# Altium PCB 第二形态第二版（4层）.pcbdoc
Units mil, origin at the board's own origin, x right, y up, seen from the top; angles counter-clockwise.
Board outline 2935 x 4395 mil, 2 copper layers (Top Layer, Bottom Layer); 39 components, 53 nets, 165 pads, 29 vias.
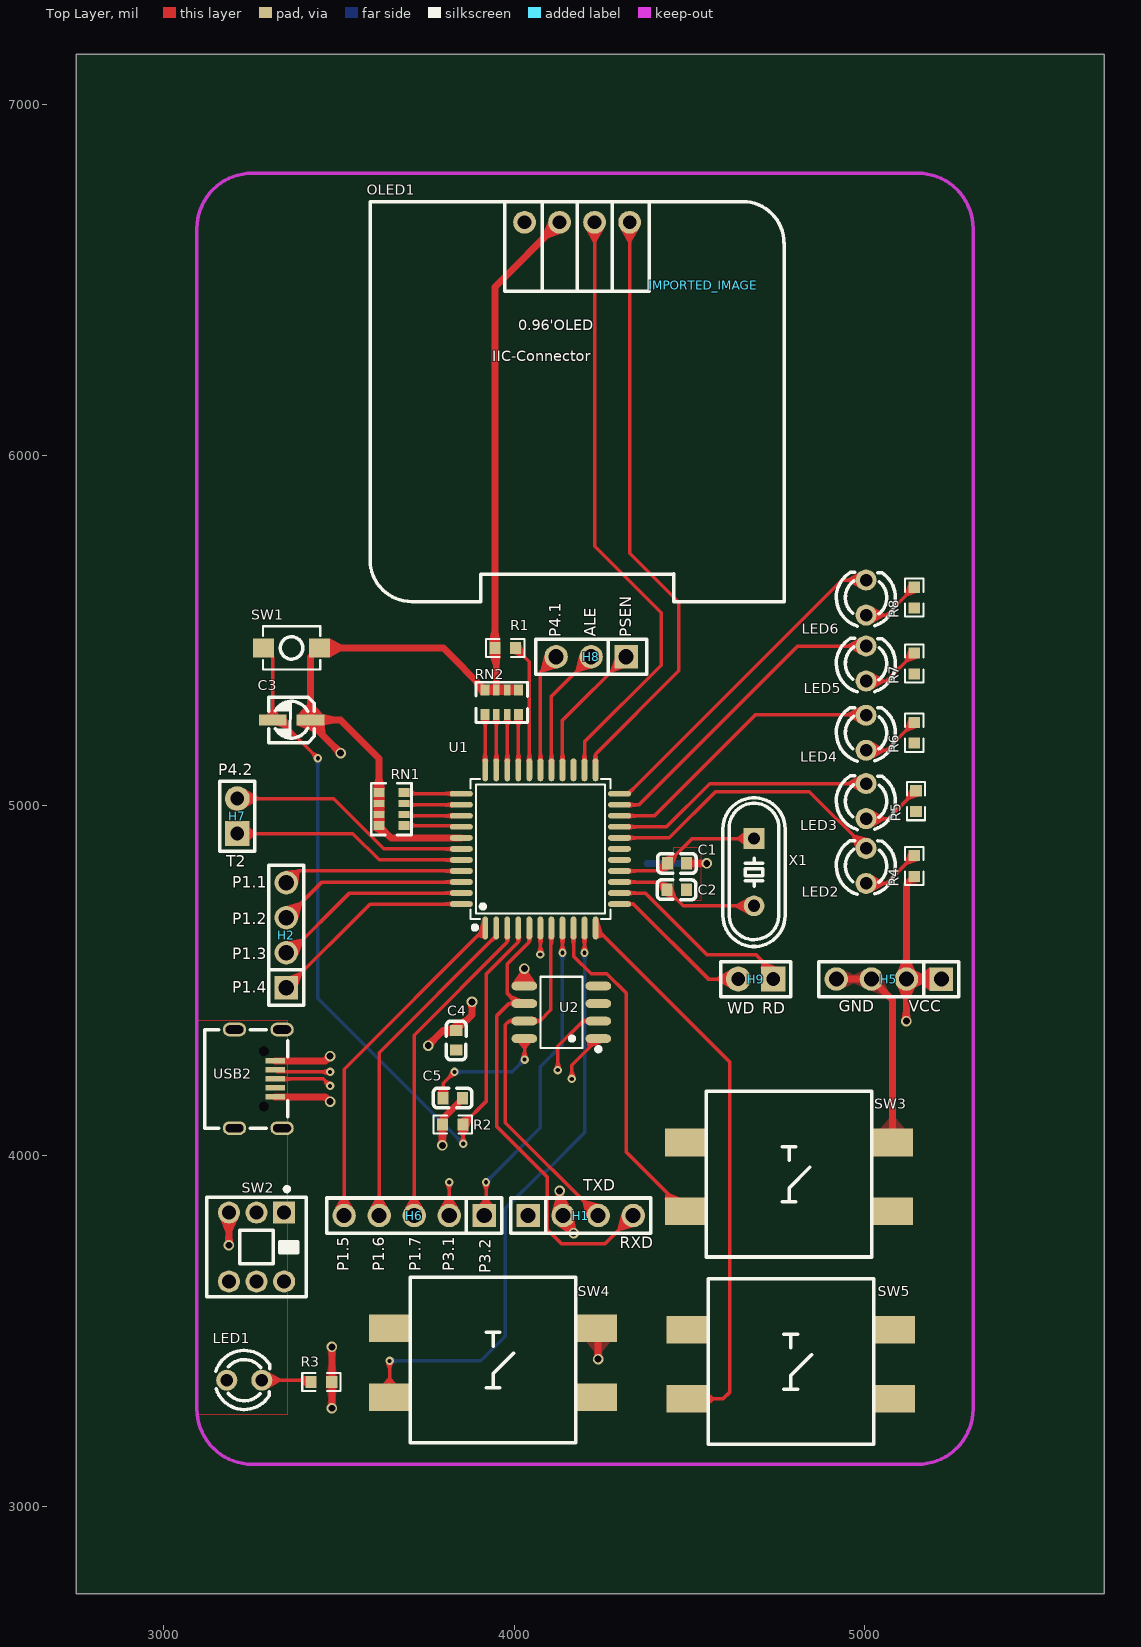
[diagram p0: Top Layer view]
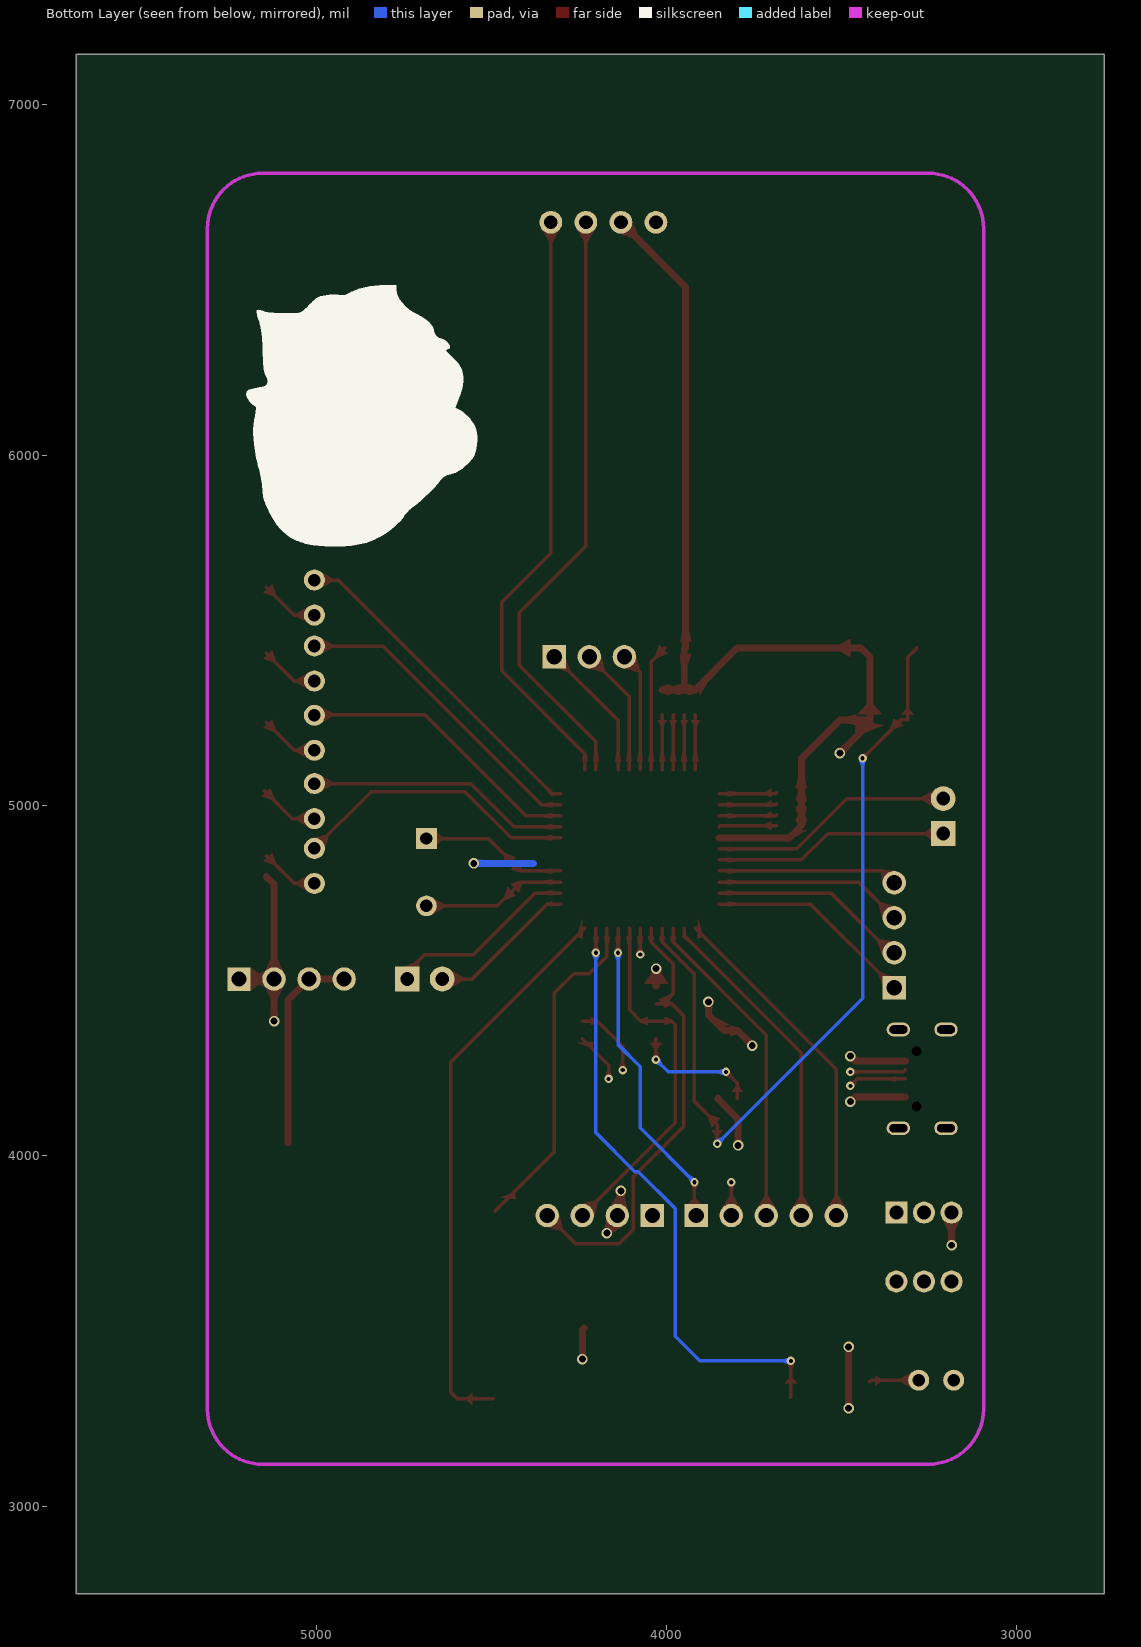
[diagram p1: Bottom Layer view, seen from below]

## Layer stack, top to bottom
Top Layer: signal copper (thickness not stored)
Dielectric: dielectric 12.6, FR-4, Dk 4.8
Bottom Layer: signal copper (thickness not stored)

## Board outline
5685,2750 2750,2750 2750,7145 5685,7145

## Components (designator, comment, footprint, x,y, rotation, side; value= is the part's Value field where it differs from the comment)
C1 "CC0603KRX7R9BB104" C0603 4465,4835 r0 top
C2 "CC0603KRX7R9BB104" C0603 4464.26,4759.74 r0 top
C3 "C_Ele_SMD_3x5.4mm" C_Ele_SMD_3x5.4mm 3365,5245 r0 top
C4 "CAP_0603" C0603 3835,4330 r90 top
C5 "CAP_0603" C0603 3825,4165 r0 top
H1 "HDR-M_2.54_1x4P" HDR-TH_4P-P2.54-V-M 4190,3830 r0 top
H2 "HDR-M_2.54_1x4P" HDR-TH_4P-P2.54-V-M 3350,4630 r90 top
H5 "HDR-M_2.54_1x4P" HDR-TH_4P-P2.54-V-M 5070,4505 r180 top
H6 "HDR-M_2.54_1x5P" HDR-TH_5P-P2.54-V-M 3715,3830 r180 top
H7 "HDR-M_2.54_1x2P" HDR-TH_2P-P2.54-V-M-1 3210,4970 r90 top
H8 "HDR-M_2.54_1x3P" HDR-TH_3P-P2.54-V-M 4220,5425 r180 top
H9 "HDR-M_2.54_1x2P" HDR-TH_2P-P2.54-V-M-1 4690,4505 r180 top
IMPORTED_IMAGE "IMPORTED_IMAGE" IMPORTED_IMAGE 4540,6485 r0 top
LED1 "LED_TH-R_3mm" LED_TH-3mm 3230,3360 r0 top
LED2 "LED_TH-R_3mm" LED_TH-3mm 5004.81,4827.84 r90 top
LED3 "LED_TH-R_3mm" LED_TH-3mm 5004.81,5012.84 r90 top
LED4 "LED_TH-R_3mm" LED_TH-3mm 5004.81,5207.84 r90 top
LED5 "LED_TH-R_3mm" LED_TH-3mm 5004.81,5405.54 r90 top
LED6 "LED_TH-R_3mm" LED_TH-3mm 5004.81,5593.77 r90 top
OLED1 "0.96OLED模块_4P" 0.96OLED_4P 4180,6665 r0 top
R1 "Res_0603" R0603 3975,5450 r0 top
R2 "Res_0603" R0603 3825,4090 r0 top
R3 "Res_0603" R0603 3450,3355 r0 top
R4 "Res_0603" R0603 5142.32,4827.84 r90 top
R5 "Res_0603" R0603 5147.32,5012.84 r90 top
R6 "Res_0603" R0603 5142.32,5207.84 r90 top
R7 "Res_0603" R0603 5142.32,5405.54 r90 top
R8 "Res_0603" R0603 5142.32,5593.77 r90 top
RN1 "4D03WGJ0103T5E" RES-ARRAY-SMD_0603-8P-L3.2-W1.6-BL 3650,4990 r90 top
RN2 "4D03WGJ0103T5E" RES-ARRAY-SMD_0603-8P-L3.2-W1.6-BL 3965,5295 r180 top
SW1 "Key_SMD_3x4x2" Key_SMD_3x4x2 3365,5450 r0 top
SW2 "SP-2212" SW-TH_6P-L7.2-W7.2-P2.00-LS5.0 3265,3740 r180 top
SW3 "Key_SMD_12x12x7.3" Key_SMD_12x12x7.3 4785,3940 r0 top
SW4 "Key_SMD_12x12x7.3" Key_SMD_12x12x7.3 3940,3410 r0 top
SW5 "Key_SMD_12x12x7.3" Key_SMD_12x12x7.3 4790,3405 r0 top
U1 "STC89C52RC-40I-LQFP44" LQFP-44_L10.0-W10.0-P0.80-LS12.0-BL 4075.24,4876.43 r0 top
U2 "CH340N" SOP-8_L4.9-W3.9-P1.27-LS6.0-BL 4135,4410 r90 top
USB2 "USB_Micro-B" USB_Micro 3270,4220 r270 top
X1 "X49SD12MSD2SC" HC-49US_L11.5-W4.5-P4.88 4685,4810 r270 top

## Footprints (in the part's own frame and the unit in brackets; to place one, negate y for a bottom-side part, rotate by r counter-clockwise, add the part's x,y. Pads: shape width x height; smd on the part's side, far side on the other; paste and mask are expansions set on the pad)
0.96OLED_4P [mm]
  round 1.65 hole 1 copper offset 0,0 mask+0.051: 1(-3.81,-0.002) 2(-1.27,0.001) 3(1.27,0.001) 4(3.81,0.001)
  silkscreen extent -15,-27.5 15,1.5
C0603 [mm]
  rect 0.8x0.9 smd mask+0.051: 1(-0.7,0) 2(0.7,0)
  silkscreen extent -1.41,-0.71 1.39,0.72
C_Ele_SMD_3x5.4mm [mil]
  rect 78.7x31.5 smd paste+0 mask+2: 1(54.1,-0.55) 2(-53.7,-0.55)
  silkscreen extent -65,-65 65,65
HC-49US_L11.5-W4.5-P4.88 [mm]
  rect 1.5x1.5 hole 0.9 mask+0.051: 1(-2.44,0)
  round 1.5 hole 0.9 mask+0.051: 2(2.44,0)
  silkscreen extent -5.39,-2.25 5.39,2.25
HDR-TH_2P-P2.54-V-M-1 [mm]
  rect 1.8x1.8 hole 1 mask+0.051: 1(-1.27,0)
  round 1.8 hole 1 mask+0.051: 2(1.27,0)
  silkscreen extent -2.54,-1.27 2.54,1.27
HDR-TH_3P-P2.54-V-M [mm]
  rect 1.7x1.7 hole 1.1 mask+0.051: 1(-2.54,0)
  round 1.7 hole 1.1 mask+0.051: 2(0,0) 3(2.54,0)
  silkscreen extent -4.02,-1.27 4.02,1.27
HDR-TH_4P-P2.54-V-M [mm]
  rect 1.7x1.7 hole 1.1 mask+0.051: 1(-3.81,0)
  round 1.7 hole 1.1 mask+0.051: 2(-1.27,0) 3(1.27,0) 4(3.81,0)
  silkscreen extent -5.08,-1.27 5.08,1.27
HDR-TH_5P-P2.54-V-M [mm]
  rect 1.7x1.7 hole 1.1 mask+0.051: 1(-5.08,0)
  round 1.7 hole 1.1 mask+0.051: 2(-2.54,0) 3(0,0) 4(2.54,0) 5(5.08,0)
  silkscreen extent -6.35,-1.27 6.35,1.27
IMPORTED_IMAGE [mil]
Key_SMD_3x4x2 [mm]
  rect 1.53x1.36 smd paste+0 mask+0.051: 1(-2.035,0) 2(2.035,0)
  silkscreen extent -2.08,-1.58 2.08,1.58
Key_SMD_12x12x7.3 [mil]
  rect 118.1x78.7 smd paste+0 mask+2: 1(-295.3,-98.4) 2(295.3,-98.4) 3(295.3,98.4) 4(-295.3,98.4)
  silkscreen extent -236,-228 236,244
LED_TH-3mm [mil]
  round 60 hole 36 paste+0 mask+2: 1(-50,0) 2(50,0)
  silkscreen extent -81,-84 72,85
LQFP-44_L10.0-W10.0-P0.80-LS12.0-BL [mm]
  oval 0.42x1.67 smd mask+0.051: 1(-4,-5.735) 2(-3.2,-5.735) 3(-2.4,-5.735) 4(-1.6,-5.735) 5(-0.8,-5.735) 6(0,-5.735) 7(0.8,-5.735) 8(1.6,-5.735) 9(2.4,-5.735) 10(3.2,-5.735) 11(4,-5.735) 23(4,5.735) 24(3.2,5.735) 25(2.4,5.735) 26(1.6,5.735) 27(0.8,5.735) 28(0,5.735) 29(-0.8,5.735) 30(-1.6,5.735) 31(-2.4,5.735) 32(-3.2,5.735) 33(-4,5.735)
  oval 1.67x0.42 smd mask+0.051: 12(5.735,-4) 13(5.735,-3.2) 14(5.735,-2.4) 15(5.735,-1.6) 16(5.735,-0.8) 17(5.735,0) 18(5.735,0.8) 19(5.735,1.6) 20(5.735,2.4) 21(5.735,3.2) 22(5.735,4) 34(-5.735,4) 35(-5.735,3.2) 36(-5.735,2.4) 37(-5.735,1.6) 38(-5.735,0.8) 39(-5.735,0) 40(-5.735,-0.8) 41(-5.735,-1.6) 42(-5.735,-2.4) 43(-5.735,-3.2) 44(-5.735,-4)
  silkscreen extent -5.08,-5.85 5.08,5.08
R0603 [mil]
  rect 31.75x34.02 smd paste-3937.01 mask+2: 1(-29.66,0) 2(29.66,0)
  silkscreen extent -55,-26 55,26
RES-ARRAY-SMD_0603-8P-L3.2-W1.6-BL [mm]
  rect 0.65x0.8 smd mask+0.051: 1(-1.2,-0.9) 4(1.2,-0.9) 5(1.2,0.9) 8(-1.2,0.9)
  rect 0.5x0.8 smd mask+0.051: 2(-0.4,-0.9) 3(0.4,-0.9) 6(0.4,0.9) 7(-0.4,0.9)
  silkscreen extent -1.87,-1.45 1.87,1.47
SOP-8_L4.9-W3.9-P1.27-LS6.0-BL [mm]
  oval 0.63x1.865 smd mask+0.051: 1(-1.905,-2.682) 2(-0.635,-2.682) 3(0.635,-2.682) 4(1.905,-2.682) 5(1.905,2.682) 6(0.635,2.682) 7(-0.635,2.682) 8(-1.905,2.682)
  silkscreen extent -2.82,-2.83 2.58,1.52
SW-TH_6P-L7.2-W7.2-P2.00-LS5.0 [mm]
  rect 1.6x1.6 hole 1 mask+0.051: 1(-2,-2.5)
  round 1.6 hole 1 mask+0.051: 2(0,-2.5) 3(2,-2.5) 4(-2,2.5) 5(0,2.5) 6(2,2.5)
  silkscreen extent -3.6,-4.35 3.6,3.6
USB_Micro [mm]
  rect 0.4x1.4 smd paste-100 mask+0.05: 1(-1.3,1.225) 2(-0.65,1.225) 3(0,1.225) 4(0.65,1.225) 5(1.3,1.225)
  oval 1x1.7 hole 0.6 slot 1.3 at 90 deg paste+0 mask+0.05: 6(-3.575,-1.725) 6(-3.575,1.725) 6(3.575,-1.725) 6(3.575,1.725)
  Multi-Layer board cut-out: -2,0.75 -2.152,0.715 -2.274,0.618 -2.341,0.478 -2.341,0.322 -2.274,0.182 -2.152,0.085 -2,0.05 -2,0.05 -1.848,0.085 -1.726,0.182 -1.659,0.322 -1.659,0.478 -1.726,0.618 -1.848,0.715 -2,0.75
  Multi-Layer board cut-out: 2,0.75 1.848,0.715 1.726,0.618 1.659,0.478 1.659,0.322 1.726,0.182 1.848,0.085 2,0.05 2,0.05 2.152,0.085 2.274,0.182 2.341,0.322 2.341,0.478 2.274,0.618 2.152,0.715 2,0.75
  silkscreen extent -3.57,-3.87 3.57,2.14

## Via types
v1: diameter 30, hole 19.7, Top Layer to Bottom Layer, 15 vias
v2: diameter 24, hole 12, Top Layer to Bottom Layer, 9 vias
v3: diameter 24, hole 11.8, Top Layer to Bottom Layer, 5 vias

## Nets (pads, with @x,y where several pads share a name; then routed paths per layer and width w, separated by ;. In a path a pad name is that pad's centre, name@x,y a point inside that pad or via, vN(x,y) a via of type N, cw(c..) or ccw(c..) an arc to the next point about the centre after c; other vN are vias at no path point)
$1N1450: RN1.1 U1.37 | length 165.4
  Top Layer w10: RN1.1 3846.11,4942.76 U1.37
$1N1451: RN1.2 U1.36 | length 165.4
  Top Layer w10: RN1.2 3688.76,4970.92 U1.36
$1N1452: RN1.3 U1.35 | length 165.4
  Top Layer w10: RN1.3 3688.77,5002.41 U1.35
$1N1453: RN1.4 U1.34 | length 165.4
  Top Layer w10: RN1.4 3688.76,5033.91 U1.34
$1N1455: RN2.5 U1.33 | length 157.3
  Top Layer w10: U1.33 RN2.5
$1N1456: RN2.6 U1.32 | length 157.3
  Top Layer w10: U1.32 RN2.6@3949.26,5259.56
$1N1457: RN2.7 U1.31 | length 157.3
  Top Layer w10: U1.31 RN2.7@3980.75,5259.56
$1N1458: RN2.8 U1.30 | length 157.3
  Top Layer w10: U1.30 RN2.8
$1N1459: R1.2 U1.29 | length 364
  Top Layer w10: R1.2 4043.74,5410.92 U1.29
$1N1519: LED1.2 R3.1 | length 142.4
  Top Layer w10: LED1.2 3415.34,3360 R3.1
$1N1531: LED2.1 R4.2 | length 170.5
  Top Layer w10: LED2.1 5062.66,4777.84 R4.2
$1N1532: LED3.1 R5.2 | length 175.5
  Top Layer w10: LED3.1 5067.66,4962.84 R5.2
$1N1533: LED4.1 R6.2 | length 170.5
  Top Layer w10: LED4.1 5062.66,5157.84 R6.2
$1N1534: LED5.1 R7.2 | length 170.5
  Top Layer w10: LED5.1 5062.66,5355.54 R7.2
$1N1535: LED6.1 R8.2 | length 170.5
  Top Layer w10: LED6.1 5062.66,5543.77 R8.2
$1N1554: C5.1 U2.8 | length 363.2
  Top Layer w10: C5.1 3797.44,4207.44 v2(3830,4240) ; U2.8 4030,4334.39 v2(4030,4275)
  Bottom Layer w10: v2(3830,4240) 3995,4240 v2(4030,4275)
ALE: H8.2 U1.27 | length 369.7
  Top Layer w10: U1.27 4106.74,5311.74 H8.2
D+: U2.1 USB2.3 | length 1009.7
  Top Layer w10: USB2.3 3455,4220 v2(3475,4200) ; v2(4165,4220) 4165,4259.39 U2.1
  Inner1 w10: v2(3475,4200) 4145,4200 v2(4165,4220)
D-: U2.2 USB2.2 | length 1039.6
  Top Layer w10: USB2.2 3323.82,4240 v2(3475,4240) ; v2(4125,4245) 4125,4313.1 4196.9,4385 U2.2
  Inner1 w10: v2(3475,4240) 3780,4240 3803,4263 3847,4263 3865,4245 v2(4125,4245)
GND: C1.2 C2.2 C4.1 C5.2 H1.1 H5.3 H5.4 OLED1.1 R2.1 R3.2 SW3.3 SW4.3 SW5.3 U1.16 U2.3 USB2.5 | length 3425.5
  Top Layer w19.7: USB2.5 3461.18,4168.82 v1(3475,4155) ; v1(3480,3280) 3480,3354.66 R3.2 3480,3355.34 v1(3480,3455) ; v1(3795.34,4030) R2.1 3795.34,4105.81 3852.56,4163.03 C5.2 ; SW4.3 4240,3503.7 v1(4240,3420) ; C1.2 v1(4550,4835) ; H5.4 H5.3 5080.3,4444.7 SW3.3
  Inner1 w19.7: v1(3475,4155) 3600,4030 v1(3795.34,4030) ; v1(3480,3280) 4100,3280 v1(4240,3420) ; v1(3480,3455) 3480,3650 3520,3690 3900,3690 H1.1
  Bottom Layer w19.7: 4380,4835 v1(4550,4835)
P1.1: H2.4 U1.41 | length 513.3
  Top Layer w10: H2.4 3383.44,4813.44 U1.41
P1.2: H2.3 U1.42 | length 541.7
  Top Layer w10: H2.3 3451.94,4781.94 U1.42
P1.3: H2.2 U1.43 | length 570.1
  Top Layer w10: H2.2 3360,4580 3530.45,4750.45 U1.43
P1.4: H2.1 U1.44 | length 598.4
  Top Layer w10: H2.1 3588.95,4718.95 U1.44
P1.5: H6.5 U1.1 | length 987.5
  Top Layer w10: H6.5 3515,4247.89 U1.1
P1.6: H6.4 U1.2 | length 959.1
  Top Layer w10: H6.4 3615,4295 3949.26,4629.26 U1.2
P1.7: H6.3 U1.3 | length 930.7
  Top Layer w10: H6.3 3715,4345.02 3980.75,4610.77 U1.3
P2.0: LED2.2 U1.18 | length 825.7
  Top Layer w10: U1.18 4442.93,4907.93 4575,5040 4842.65,5040 LED2.2
P2.1: LED3.2 U1.19 | length 759.9
  Top Layer w10: U1.19 4435,4939.42 4558.42,5062.84 LED3.2@5009.81,5062.84
P2.2: LED4.2 U1.20 | length 824.4
  Top Layer w10: U1.20 4400.92,4970.92 4690,5260 5002.65,5260 LED4.2
P2.3: LED5.2 U1.21 | length 891.5
  Top Layer w10: U1.21 4356.68,5002.41 4809.81,5455.54 LED5.2
P2.4: LED6.2 U1.22 | length 956.4
  Top Layer w10: U1.22 4326.03,5033.91 4935.88,5643.77 LED6.2
P3.1: H6.2 U1.6 | length 928.4
  Top Layer w10: H6.2 v2(3815,3925) ; v2(4075,4575) 4075.24,4575.24 U1.6
  Inner2 w10: v2(3815,3925) 4075,4185 v2(4075,4575)
P3.2: H6.1 U1.8 | length 918.2
  Top Layer w10: H6.1 3920,3835 v3(3920,3925) ; v3@4138.23,4575 U1.8
  Bottom Layer w10: v3(3920,3925) 4075,4080 4075,4255 4138.23,4318.23 v3(4138.23,4580.05)
P3.3: SW3.1 U1.9 | length 967.9
  Top Layer w10: U1.9 4169.73,4570.27 4220,4520 4265,4520 4320,4465 4320,4011.3 SW3.1
P3.4: SW4.1 U1.10 | length 1728
  Top Layer w10: SW4.1@3644.77,3311.67 v3(3644.77,3415.15) ; v3(4201.22,4580) U1.10
  Bottom Layer w10: v3(3644.77,3415.15) 3644.92,3415 3905,3415 3975,3485 3975,3850 4080,3955 4090,3955 4201.22,4066.22 v3(4201.22,4580)
P3.5: SW5.1 U1.11 | length 1611.9
  Top Layer w10: U1.11 4615,4268.36 4615,3325 4596.6,3306.6 SW5.1
P4.1: H8.3 U1.28 | length 341.3
  Top Layer w10: U1.28 4075.24,5380.24 H8.3
P4.2: H7.2 U1.39 | length 698.9
  Top Layer w10: H7.2 3485,5020 3628.57,4876.43 U1.39
PSEN: H8.1 U1.26 | length 398.1
  Top Layer w10: U1.26 4138.23,5243.23 H8.1
RD: H9.1 U1.13 | length 552.4
  Top Layer w10: U1.13 4374.55,4750.45 4550,4575 4690,4575 4740,4525 H9.1
RST: C3.2 R2.2 SW1.1 U1.4 | length 2343.5
  Top Layer w10: SW1.1 3311.3,5423.58 C3.2 3330.55,5244.45 v3(3440,5135) ; v2(3855,4035) 3855,4089.66 R2.2 3920,4155.34 3920,4518.52 4012.25,4610.77 U1.4
  Bottom Layer w10: v3(3440,5135) 3440,4450 v2(3855,4035)
RXD: H1.4 U1.5 U2.6 | length 1312.7
  Top Layer w10: U2.6 U2.6@4010,4435 ; U1.5 4043.74,4610.77 3980,4547.03 3980,4465 U2.6@4010,4435 ; H1.4 4260,3750 4135,3750 4095,3790 4095,3940 3950,4085 3950,4399.32 3985.68,4435 U2.6@4010,4435
SCL: OLED1.3 U1.24 | length 1732.1
  Top Layer w10: U1.24 4201.22,5182.1 4420,5400.88 4420,5550 4230,5740 OLED1.3
SDA: OLED1.4 U1.23 | length 1719.1
  Top Layer w10: U1.23 4232.72,5147.22 4470,5384.51 4470,5580 4330,5720 OLED1.4
T2: H7.1 U1.40 | length 670.5
  Top Layer w10: H7.1 3540,4920 3615.07,4844.93 U1.40
TXD: H1.3 U1.7 U2.7 | length 1036.2
  Top Layer w10: U1.7 4105,4648.91 4105,4416.9 4073.1,4385 U2.7 3985.68,4385 3975,4374.32 3975,4095 H1.3
USB_VCC: C4.2 LED1.1 SW2.2 U2.5 USB2.1 | length 892.4
  Top Layer w19.7: USB2.1 3461.18,4271.18 v1(3475,4285) ; v1(3755,4315) 3797.56,4357.56 C4.2 3880,4402.56 v1(3880,4440) ; U2.5 v1(4029.39,4535)
  Inner2 w19.7: v1(3475,4285) 3725,4285 v1(3755,4315) ; v1(3880,4440) 3934.39,4440 v1(4029.39,4535)
VCC: C3.1 H1.2 H5.1 H5.2 OLED1.2 R1.1 R4.1 R5.1 R6.1 R7.1 R8.1 RN1.5 RN1.6 RN1.7 RN1.8 RN2.1 RN2.2 RN2.3 RN2.4 SW1.2 SW2.3 U1.38 | length 7660.1
  Top Layer w19.7: v1(3186.26,3745) SW2.3 ; v1(3505,5150) 3419.1,5235.9 C3.1 ; 3505,5245 3504.45,5244.45 ; U1.38 3649.39,4907.93 RN1.8 RN1.7 RN1.6 RN1.5 3614.57,5134.34 3504.45,5244.45 ; RN2.1 RN2.2 RN2.3 ; v1(4130,3900) 4130,3840 H1.2 4140,3810 v1(4170.01,3780) ; OLED1.2 3945.34,6480.39 R1.1 3949.25,5446.09 RN2.3 ; v1(5120,4385) H5.2 ; R4.1 5120,4775.87 H5.2 ; H5.1 H5.2 ; C3.1 3504.45,5244.45 ; C3.1 3419.1,5423.98 SW1.2 3798.2,5450 RN2.4 RN2.3
  Inner2 w19.7: v1(3186.26,3745) 4135.01,3745 v1(4170.01,3780) ; SW2.3 3130,3894.68 3130,5065 3149.7,5084.7 3439.7,5084.7 v1(3505,5150) ; v1(4130,3900) 4615,4385 v1(5120,4385)
WR: H9.2 U1.12 | length 427.6
  Top Layer w10: U1.12 4341.05,4718.95 4555,4505 H9.2
XTAL1: C1.1 U1.15 X1.1 | length 422.3
  Top Layer w10: U1.15 4415.88,4813.44 C1.1 4508.5,4906.06 X1.1
XTAL2: C2.1 U1.14 X1.2 | length 412.1
  Top Layer w10: U1.14 4414.49,4781.94 C2.1 4482.49,4713.94 X1.2
"": SW2.1 SW2.4 SW2.5 SW2.6 SW3.2 SW3.4 SW4.2 SW4.4 SW5.2 SW5.4 U1.17 U1.25 U2.4 USB2.4 USB2.6

## Polygon pours and split planes (outlines as drawn)
GND on Top Layer (solid, remove dead copper, pour order 0): 4455,4730 4535,4730 4535,4880 4455,4880
VCC on Top Layer (solid, remove dead copper, pour order 1): 5010,4735 5290,4735 5290,5780 5010,5780
USB_VCC on Top Layer (solid, remove dead copper, pour order 2): 3095,3263.41 3354.1,3263.41 3354.1,4385.41 3095,4385.41
GND on Bottom Layer (solid, remove dead copper, pour order 3): 3015,6895 5425,6895 5425,5085 4442.85,5085 4441.06,5086.79 4441.06,4503.88 5424.84,4503.88 5424.84,3075 5369.84,3020 3005,3020 3005,6885
GND on Top Layer (solid, remove dead copper, pour order 4): 4440,4575 5345,4575 5345,3030 5315,3000 3000,3000 3000,6860 5435,6860 5435,5810 4964.79,5794.99 4950.03,5101.47 4440,5096.61

## Keep-outs
Board Outline Layer:
  lines w10 net "": 3095,3277.48 ccw(c3252.48,3277.48) 3252.48,3120 5152.52,3120 ccw(c5152.52,3277.48) 5310,3277.48 5310,6647.52 ccw(c5152.52,6647.52) 5152.52,6805 3252.48,6805 ccw(c3252.48,6647.52) 3095,6647.52 3095,3277.48

## Other copper
Top Layer:
  region net P1.5: 3898.88,4624.7 3911.98,4620.12 3909.49,4675.25 3898.88,4638.84
  region net P1.6: 3935.06,4607.99 3957.53,4626.04 3940.99,4626.04 3930.38,4617.45
  region net P1.7: 3985.75,4610.77 3989.02,4626.04 3972.48,4626.04 3975.75,4610.77
  region net RST: 4017.25,4610.77 4020.52,4626.04 4003.98,4626.04 4007.25,4610.77
  region net RXD: 4048.74,4610.77 4052.01,4626.04 4035.47,4626.04 4038.74,4610.77
  region net P3.1: 4080.24,4604.45 4083.51,4626.04 4066.97,4626.04 4070.24,4604.45
  region net TXD: 4100,4606.25 4110,4603.44 4115.01,4626.04 4098.47,4626.04
  region net P3.2: 4143.23,4604.45 4146.5,4626.04 4129.96,4626.04 4133.23,4604.45
  region net P3.3: 4174.73,4604.45 4178,4626.04 4161.46,4626.04 4164.73,4604.45
  region net P3.4: 4206.22,4604.45 4209.49,4626.04 4192.95,4626.04 4196.22,4604.45
  region net P3.5: 4251.59,4638.84 4240.99,4675.25 4238.49,4620.12 4251.59,4624.7
  region net WR: 4341.05,4713.95 4341.05,4723.95 4325.63,4727.22 4325.63,4710.69
  region net RD: 4347.22,4755.45 4325.63,4758.72 4325.63,4742.19 4347.22,4745.45
  region net XTAL2: 4347.22,4786.94 4325.63,4790.21 4325.63,4773.68 4347.22,4776.94
  region net XTAL1: 4347.22,4818.44 4325.63,4821.71 4325.63,4805.18 4347.22,4808.44
  region net P2.0: 4347.22,4912.93 4325.63,4916.2 4325.63,4899.67 4347.22,4902.93
  region net P2.1: 4347.22,4944.42 4325.63,4947.69 4325.63,4931.16 4347.22,4934.42
  region net P2.2: 4347.22,4975.92 4325.63,4979.19 4325.63,4962.66 4347.22,4965.92
  region net P2.3: 4347.22,4997.41 4347.22,5007.41 4325.63,5010.68 4325.63,4994.15
  region net P2.4: 4337.7,5052.66 4325.63,5042.18 4325.63,5025.65 4344.47,5045.29
  region net SDA: 4227.72,5147.22 4224.45,5126.83 4240.99,5126.83 4237.72,5147.22
  region net SCL: 4196.22,5148.41 4192.95,5126.83 4209.49,5126.83 4206.22,5148.41
  region net PSEN: 4133.23,5148.41 4129.96,5126.83 4146.5,5126.83 4143.23,5148.41
  region net ALE: 4101.74,5148.41 4098.47,5126.83 4115.01,5126.83 4111.74,5148.41
  region net P4.1: 4070.24,5148.41 4066.97,5126.83 4083.51,5126.83 4080.24,5148.41
  region net $1N1459: 4038.74,5148.41 4035.47,5126.83 4052.01,5126.83 4048.74,5148.41
  region net $1N1458: 4007.25,5148.41 4003.98,5126.83 4020.52,5126.83 4017.25,5148.41
  region net $1N1457: 3975.75,5148.41 3972.48,5126.83 3989.02,5126.83 3985.75,5148.41
  region net $1N1456: 3944.26,5148.41 3940.99,5126.83 3957.53,5126.83 3954.26,5148.41
  region net $1N1455: 3912.76,5148.41 3909.49,5126.83 3926.03,5126.83 3922.76,5148.41
  region net $1N1453: 3803.26,5028.91 3824.84,5025.65 3824.84,5042.18 3803.26,5038.91
  region net $1N1452: 3803.26,4997.41 3824.84,4994.15 3824.84,5010.68 3803.26,5007.41
  region net $1N1451: 3803.26,4965.92 3824.84,4962.66 3824.84,4979.19 3803.26,4975.92
  region net P4.2: 3803.26,4871.43 3824.84,4868.17 3824.84,4884.7 3803.26,4881.43
  region net T2: 3803.26,4839.93 3824.84,4836.67 3824.84,4853.2 3803.26,4849.93
  region net P1.1: 3803.26,4808.44 3824.84,4805.18 3824.84,4821.71 3803.26,4818.44
  region net P1.2: 3803.26,4776.94 3824.84,4773.68 3824.84,4790.21 3803.26,4786.94
  region net P1.3: 3803.26,4745.45 3824.84,4742.19 3824.84,4758.72 3803.26,4755.45
  region net P1.4: 3803.26,4723.95 3803.26,4713.95 3824.84,4710.69 3824.84,4727.22
  region net VCC: 3624.41,5079.59 3604.72,5079.59 3598.82,5050.04 3630.31,5050.04
  region net VCC: 3604.72,5005.75 3624.41,5005.75 3630.31,5024.44 3598.82,5024.44
  region net $1N1453: 3716.18,5028.91 3716.18,5038.91 3701.18,5050.04 3701.18,5024.44
  region net VCC: 3604.72,4974.25 3624.41,4974.25 3630.31,4995.91 3598.82,4995.91
  region net VCC: 3604.72,5037.24 3598.82,5015.59 3630.31,5015.59 3624.41,5037.24
  region net $1N1452: 3716.18,4997.41 3716.18,5007.41 3701.18,5015.59 3701.18,4995.91
  region net VCC: 3604.72,5005.75 3598.82,4984.09 3630.31,4984.09 3624.41,5005.75
  region net VCC: 3604.72,4942.76 3624.41,4942.76 3630.31,4964.41 3598.82,4964.41
  region net $1N1451: 3716.18,4965.92 3716.18,4975.92 3701.18,4984.09 3701.18,4964.41
  region net VCC: 3634.33,4909.07 3651.21,4920.05 3630.31,4929.96 3598.82,4929.96
  region net VCC: 3604.72,4974.25 3598.82,4955.56 3630.31,4955.56 3624.41,4974.25
  region net $1N1450: 3716.18,4937.76 3716.18,4947.76 3701.18,4955.56 3701.18,4929.96
  region net $1N1455: 3912.76,5228.82 3922.76,5228.82 3930.56,5243.82 3904.96,5243.82
  region net VCC: 3895.05,5367.08 3884.07,5350.2 3904.96,5314.69 3904.96,5346.18
  region net VCC: 3949.25,5340.28 3930.56,5346.18 3930.56,5314.69 3949.25,5320.59
  region net $1N1456: 3944.26,5228.82 3954.26,5228.82 3959.09,5243.82 3939.41,5243.82
  region net VCC: 3980.75,5340.28 3959.09,5346.18 3959.09,5314.69 3980.75,5320.59
  region net VCC: 3917.76,5340.28 3917.76,5320.59 3939.41,5314.69 3939.41,5346.18
  region net $1N1457: 3975.75,5228.82 3985.75,5228.82 3990.59,5243.82 3970.91,5243.82
  region net VCC: 3949.25,5340.28 3949.25,5320.59 3970.91,5314.69 3970.91,5346.18
  region net VCC: 4012.24,5340.28 3990.59,5346.18 3990.59,5314.69 4012.24,5320.59
  region net $1N1458: 4007.25,5228.82 4017.25,5228.82 4025.04,5243.82 3999.44,5243.82
  region net VCC: 3980.75,5340.28 3980.75,5320.59 3999.44,5314.69 3999.44,5346.18
  region net $1N1459: 4025.2,5422.39 4031.14,5430.59 4020.54,5458.87 3996.92,5432.99
  region net VCC: 3939.4,5403.44 3959.1,5403.44 3961.22,5432.99 3929.46,5432.99
  region net VCC: 3935.49,5496.56 3929.46,5467.01 3961.22,5467.01 3955.19,5496.56
  region net XTAL1: 4640.47,4911.06 4640.47,4901.06 4655.47,4888.56 4655.47,4923.56
  region net XTAL2: 4665.47,4736.09 4634.8,4718.94 4634.8,4708.94 4665.47,4691.79
  region net XTAL1: 4412.35,4816.98 4419.42,4809.91 4444.47,4817.28 4421.69,4844
  region net XTAL1: 4458.69,4863.32 4430.41,4852.72 4453.19,4826 4463.79,4854.28
  region net XTAL2: 4418.03,4785.48 4410.96,4778.41 4420.95,4750.74 4443.73,4777.45
  region net XTAL2: 4463.05,4740.45 4452.45,4768.74 4429.67,4742.02 4457.95,4731.41
  region net VCC: 3504.79,5459.85 3475.24,5476.77 3475.24,5423.23 3504.79,5440.15
  region net VCC: 3433.26,5207.81 3461.12,5207.81 3458.45,5245.31 3379.75,5228.7
  region net VCC: 3488,5234.6 3488,5254.3 3458.45,5260.2 3458.45,5228.7
  region net VCC: 3409.25,5289.75 3384.62,5260.2 3453.57,5260.2 3428.95,5289.75
  region net RST: 3349.84,5218.09 3361.26,5220.81 3350.65,5249.1 3321.55,5228.7
  region net RST: 3306.3,5275.2 3293.8,5260.2 3328.8,5260.2 3316.3,5275.2
  region net RST: 3850,4057.99 3860,4057.99 3870.54,4072.99 3838.78,4072.99
  region net RST: 3881.14,4109.41 3875.2,4117.61 3846.92,4107.01 3870.54,4081.13
  region net VCC: 3162.64,3817.59 3176.41,3784.88 3196.11,3784.88 3209.88,3817.59
  region net $1N1519: 3299.84,3337.5 3331,3355 3331,3365 3299.84,3382.5
  region net $1N1519: 3389.46,3365 3389.46,3355 3404.46,3342.5 3404.46,3372.01
  region net $1N1531: 5024.65,4755.34 5055.81,4772.84 5055.81,4782.84 5024.65,4800.34
  region net P2.0: 5006.69,4907.79 4972.28,4917.44 4965.21,4910.37 4974.87,4875.97
  region net $1N1532: 5024.65,4940.34 5055.81,4957.84 5055.81,4967.84 5024.65,4985.34
  region net P2.1: 4984.97,5085.34 4953.81,5067.84 4953.81,5057.84 4984.97,5040.34
  region net $1N1533: 5024.65,5135.34 5055.81,5152.84 5055.81,5162.84 5024.65,5180.34
  region net P2.2: 4986.63,5281.71 4954.19,5265 4953.47,5255 4983.4,5236.83
  region net $1N1534: 5024.65,5333.04 5055.81,5350.54 5055.81,5360.54 5024.65,5378.04
  region net P2.3: 4984.97,5478.04 4953.81,5460.54 4953.81,5450.54 4984.97,5433.04
  region net $1N1535: 5024.65,5521.27 5055.81,5538.77 5055.81,5548.77 5024.65,5566.27
  region net P2.4: 4984.97,5666.27 4953.81,5648.77 4953.81,5638.77 4984.97,5621.27
  region net $1N1531: 5114.7,4836.96 5122.91,4831.02 5151.19,4841.63 5125.31,4865.25
  region net $1N1532: 5119.7,5021.96 5127.91,5016.02 5156.19,5026.63 5130.31,5050.25
  region net $1N1533: 5114.7,5216.96 5122.91,5211.02 5151.19,5221.63 5125.31,5245.25
  region net $1N1534: 5114.7,5414.66 5122.91,5408.72 5151.19,5419.32 5125.31,5442.94
  region net $1N1535: 5114.7,5602.88 5122.91,5596.94 5151.19,5607.55 5125.31,5631.17
  region net D+: 4224.67,4311.99 4252.96,4322.6 4207.31,4326.45 4210.53,4311.99
  region net D-: 4196.9,4380 4216.3,4372.6 4216.3,4397.4 4196.9,4390
  region net $1N1554: 4025,4307.6 4035,4307.6 4047.5,4322.6 4012.5,4322.6
  region net TXD: 4073.1,4390 4053.7,4397.4 4053.7,4372.6 4073.1,4380
  region net TXD: 3985.68,4380 4005.08,4372.6 4005.08,4397.4 3985.68,4390
  region net RXD: 3985.68,4430 4005.08,4422.6 4005.08,4447.4 3985.68,4440
  region net RXD: 3994.07,4458 3984.69,4453.23 4005.08,4422.6 4022.35,4447.4
  region net USB_VCC: 4019.54,4526.95 3994.91,4492.11 4063.86,4492.11 4039.24,4526.95
  region net VCC: 4123.99,3800.62 4159.51,3776.56 4176.97,3786.97 4171.16,3817.78
  region net VCC: 4157.34,3858.62 4139.85,3889.57 4120.15,3883.4 4109.43,3843.62
  region net TXD: 4242.1,3863.4 4203.31,3873.76 4196.24,3866.69 4206.6,3827.9
  region net RXD: 4306.6,3832.1 4296.24,3793.31 4303.31,3786.24 4342.1,3796.6
  region net USB_VCC: 3797.56,4367.41 3797.56,4347.71 3817.28,4341.81 3817.28,4373.31
  region net USB_VCC: 3873.61,4382.24 3857.71,4394.2 3817.28,4373.31 3852.72,4373.31
  region net $1N1554: 3792.44,4197.72 3781.69,4182.72 3813.19,4182.72 3802.44,4197.72
  region net P1.4: 3394.07,4517 3387,4524.07 3358.72,4513.46 3383.46,4488.72
  region net P1.3: 3382.2,4570.89 3397.85,4610.78 3392.3,4619.38 3355.01,4613.09
  region net P1.2: 3383.4,4677.9 3393.76,4716.69 3386.69,4723.76 3347.9,4713.4
  region net P1.1: 3383.4,4777.9 3386.98,4809.91 3379.91,4816.98 3347.9,4813.4
  region net VCC: 5156.99,4495.15 5186.54,4471.54 5186.54,4538.46 5156.99,4514.85
  region net VCC: 5094.9,4482.87 5110.15,4448.11 5129.85,4448.11 5145.1,4482.87
  region net VCC: 5145.1,4527.13 5129.85,4561.89 5110.15,4561.89 5094.9,4527.13
  region net VCC: 5142.13,4479.9 5176.89,4495.15 5176.89,4514.85 5142.13,4530.1
  region net SDA: 4305.64,6643.57 4325,6609.83 4335,6609.83 4354.36,6643.57
  region net SCL: 4205.64,6643.57 4225,6609.83 4235,6609.83 4254.36,6643.57
  region net VCC: 4097.58,6667.08 4083.99,6632.97 4097.92,6619.04 4132.03,6632.63
  region net P3.3: 4446.81,3891.56 4432.67,3891.56 4430.65,3875.9 4475.1,3880.95
  region net P3.4: 3649.77,3365.95 3639.77,3365.95 3627.27,3350.95 3662.27,3350.95
  region net P3.5: 4568.75,3301.6 4568.75,3311.6 4553.75,3324.1 4553.75,3289.1
  region net P3.2: 3925,3878.46 3915,3878.46 3902.5,3863.46 3937.5,3863.46
  region net P3.1: 3840.1,3852.13 3820,3886.89 3810,3886.89 3789.9,3852.13
  region net P1.7: 3740.1,3852.13 3720,3886.89 3710,3886.89 3689.9,3852.13
  region net P1.6: 3640.1,3852.13 3620,3886.89 3610,3886.89 3589.9,3852.13
  region net P1.5: 3540.1,3852.13 3520,3886.89 3510,3886.89 3489.9,3852.13
  region net P4.2: 3233.44,4993.43 3270.24,5015 3270.24,5025 3233.44,5046.57
  region net T2: 3260.43,4915 3260.43,4925 3245.43,4937.5 3245.43,4902.5
  region net PSEN: 4275.93,5388 4283,5380.93 4311.28,5391.54 4286.54,5416.28
  region net ALE: 4186.6,5427.1 4176.24,5388.31 4183.31,5381.24 4222.1,5391.6
  region net P4.1: 4086.6,5427.1 4076.24,5388.31 4083.31,5381.24 4122.1,5391.6
  region net WR: 4616.56,4531.57 4579.76,4510 4579.76,4500 4616.56,4478.43
  region net RD: 4721.03,4551.04 4706.89,4551.04 4704.57,4535.68 4749.32,4540.43
  region net D+: 3360.79,4225 3345.79,4227.87 3345.79,4212.13 3360.79,4215
  region net $1N1554: 3818.02,4240.75 3812.04,4229.11 3819.11,4222.04 3830.75,4228.02
  region net $1N1554: 4039,4282.94 4035,4295.4 4025,4295.4 4021,4282.94
  region net USB_VCC: 4018.14,4525.08 4019.54,4509.5 4039.24,4509.5 4040.64,4525.08
  region net USB_VCC: 3868.75,4430.08 3870.15,4414.5 3889.85,4414.5 3891.25,4430.08
  region net USB_VCC: 3769.97,4314.06 3780,4326.07 3766.07,4340 3754.06,4329.97
  region net USB_VCC: 3460.03,4285.94 3454.22,4278.15 3468.14,4264.22 3475.94,4270.03
  region net D-: 4134,4252.94 4130,4265.4 4120,4265.4 4116,4252.94
  region net D-: 3467.06,4249 3454.6,4245 3454.6,4235 3467.06,4231
  region net D+: 4174,4227.94 4170,4240.4 4160,4240.4 4156,4227.94
  region net D+: 3475.75,4211.98 3464.11,4217.96 3457.04,4210.89 3463.02,4199.25
  region net P3.1: 3806,3917.06 3810,3904.6 3820,3904.6 3824,3917.06
  region net P3.1: 4084.16,4582.76 4080.24,4595.3 4070.24,4595.5 4066.16,4583.11
  region net VCC: 4170.94,3794.97 4158.93,3805 4145.01,3791.06 4155.03,3779.06
  region net VCC: 3197.51,3754.92 3196.11,3770.5 3176.41,3770.5 3175.01,3754.92
  region net RST: 3864,4042.94 3860,4055.4 3850,4055.4 3846,4042.94
  region net RST: 3440.75,5146.98 3429.11,5152.96 3422.04,5145.89 3428.02,5134.25
  region net VCC: 4118.75,3890.08 4120.15,3874.5 4139.85,3874.5 4141.25,3890.08
  region net VCC: 3505.94,5164.97 3493.93,5175 3480,5161.07 3490.03,5149.06
  region net VCC: 5131.25,4394.92 5129.85,4410.5 5110.15,4410.5 5108.75,4394.92
  region net P3.4: 4210.22,4587.94 4206.22,4600.4 4196.22,4600.4 4192.22,4587.94
  region net P3.4: 3635.77,3407.21 3639.77,3394.75 3649.77,3394.75 3653.77,3407.21
  region net P3.2: 4147.23,4587.98 4143.23,4600.45 4133.23,4600.45 4129.23,4587.98
  region net P3.2: 3911,3917.06 3915,3904.6 3925,3904.6 3929,3917.06
Inner1:
  region net GND: 3999.57,3775.64 4055.29,3796.54 4006.54,3845.29 3985.64,3789.57
  region net D-: 4117.06,4254 4104.6,4250 4104.6,4240 4117.06,4236
  region net D-: 3482.94,4231 3495.4,4235 3495.4,4245 3482.94,4249
  region net D+: 4153.02,4220.75 4147.04,4209.11 4154.11,4202.04 4165.75,4208.02
  region net D+: 3482.94,4191 3495.4,4195 3495.4,4205 3482.94,4209
  region net GND: 3491.25,3464.92 3489.85,3480.5 3470.15,3480.5 3468.75,3464.92
  region net GND: 3489.92,3268.75 3505.5,3270.15 3505.5,3289.85 3489.92,3291.25
  region net GND: 4225.03,3420.94 4215,3408.93 4228.93,3395 4240.94,3405.03
  region net GND: 3785.42,4041.25 3769.84,4039.85 3769.84,4020.15 3785.42,4018.75
  region net GND: 3474.06,4140.03 3486.07,4130 3500,4143.93 3489.97,4155.94
Inner2:
  region net VCC: 3188.23,3869.86 3155.36,3883.25 3141.43,3869.32 3154.83,3836.45
  region net USB_VCC: 4014.42,4535.94 4004.39,4523.93 4018.32,4510 4030.33,4520.03
  region net USB_VCC: 3889.92,4428.75 3905.5,4430.15 3905.5,4449.85 3889.92,4451.25
  region net USB_VCC: 3740.03,4315.94 3730,4303.93 3743.93,4290 3755.94,4300.03
  region net USB_VCC: 3484.92,4273.75 3500.5,4275.15 3500.5,4294.85 3484.92,4296.25
  region net P3.1: 3826.98,3924.25 3832.96,3935.89 3825.89,3942.96 3814.25,3936.98
  region net P3.1: 4066,4567.06 4070,4554.6 4080,4554.6 4084,4567.06
  region net VCC: 4155.03,3780.94 4145.01,3768.93 4158.94,3755 4170.94,3765.03
  region net VCC: 3196.18,3733.75 3211.76,3735.15 3211.76,3754.85 3196.18,3756.25
  region net VCC: 4144.97,3899.06 4155,3911.07 4141.07,3925 4129.06,3914.97
  region net VCC: 3490.03,5150.94 3480,5138.93 3493.93,5125 3505.94,5135.03
  region net VCC: 5110.08,4396.25 5094.5,4394.85 5094.5,4375.15 5110.08,4373.75
Bottom Layer:
  region net $1N1554: 3837.94,4231 3850.4,4235 3850.4,4245 3837.94,4249
  region net $1N1554: 4018.02,4275.75 4012.04,4264.11 4019.11,4257.04 4030.75,4263.02
  region net RST: 3855.75,4046.98 3844.11,4052.96 3837.04,4045.89 3843.02,4034.25
  region net RST: 3431,5127.06 3435,5114.6 3445,5114.6 3449,5127.06
  region net P3.4: 4192.22,4572.06 4196.22,4559.6 4206.22,4559.6 4210.22,4572.06
  region net P3.4: 3652.59,3406.05 3665.11,3410 3665.23,3420 3652.82,3424.05
  region net P3.2: 4129.23,4572.11 4133.23,4559.65 4143.23,4559.65 4147.23,4572.11
  region net P3.2: 3931.98,3924.25 3937.96,3935.89 3930.89,3942.96 3919.25,3936.98

## Silkscreen, mask and mechanical layers (free items; w line width, h text height)
Top Silkscreen Layer:
  text "ALE" at 4233.9,5482.23 h32.45 r90
  text "P4.1" at 4133.9,5480.8 h32.45 r90
  text "PSEN" at 4333.9,5480.8 h32.45 r90
  text "P4.2" at 3155.8,5086.1 h32.45
  text "T2" at 3178.65,4826.1 h32.45
  text "P1.1" at 3195.8,4766.1 h32.45
  text "P1.2" at 3195.8,4661.1 h32.45
  text "P1.3" at 3195.8,4561.1 h32.45
  text "P1.4" at 3195.8,4466.1 h32.45
  text "GND" at 4927.23,4411.1 h32.45
  text "VCC" at 5127.23,4411.1 h32.45
  text "WD" at 4608.65,4406.1 h32.45
  text "RD" at 4708.65,4406.1 h32.45
  text "TXD" at 4197.23,3901.1 h32.45
  text "RXD" at 4302.23,3736.1 h32.45
  text "P1.5" at 3528.9,3670.8 h32.45 r90
  text "P1.6" at 3628.9,3670.8 h32.45 r90
  text "P1.7" at 3733.9,3670.8 h32.45 r90
  text "P3.1" at 3828.9,3670.8 h32.45 r90
  text "P3.2" at 3933.9,3665.8 h32.45 r90

## Text inside footprints (layer, text, board x,y; h text height)
OLED1: Top Silkscreen Layer "IIC-Connector" at 3937.32,6268.16 h30.66; Top Silkscreen Layer "0.96'OLED" at 4011.9,6356.65 h30.66